# Altium PCB WX0.011.322PCB-4.2.PcbDoc (part 2 of 2)
Units mm, origin at the board's own origin, x right, y up, seen from the top; angles counter-clockwise.
Board outline 260.36 x 86.43 mm, 2 copper layers (Top Layer, Bottom Layer); 138 components, 92 nets, 432 pads, 350 vias.
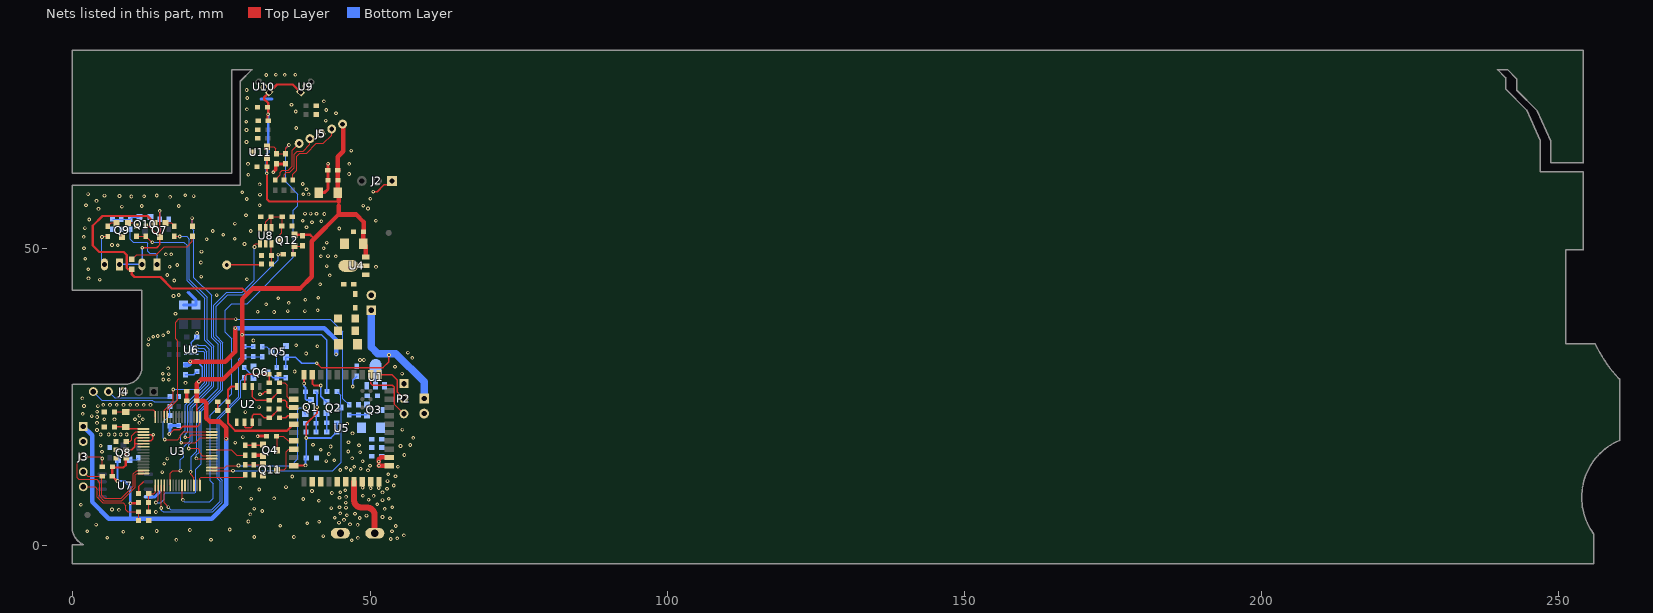
[diagram p2: the nets of this part, all layers, seen from the top]

## Via types
v1: diameter 0.61, hole 0.305, Top Layer to Bottom Layer, tented both sides, 350 vias

## Nets (pads, with @x,y where several pads share a name; then routed paths per layer and width w, separated by ;. In a path a pad name is that pad's centre, name@x,y a point inside that pad or via, vN(x,y) a via of type N, cw(c..) or ccw(c..) an arc to the next point about the centre after c; other vN are vias at no path point) (continued)
GND: C1.2 C2.2 C3.2 C4.2 C5.2 C8.2 C9.1 C10.1 C11.1 C12.1 C13.1 C14.1 C15.2 C16.1 C17.1 C18.1 C19.1 C20.1 C21.1 C22.1 C23.1 C24.1 C25.1 C26.2 C27.2 C28.1 C33.1 C34.1 C35.1 C36.2 C37.1 C38.1 C39.2 C40.1 C41.1 C42.1 C43.2 C44.2 C47.2 C48.1 C49.1 C51.1 C52.2 C53.2 C54.1 C55.2 C56.2 C57.2 C58.2 C59.2 C60.1 D3.1 J1.2 J2.1 J3.2 J4.3 J5.3 P1.2 P2.1 Q4.2 Q6.2 Q9.3 Q10.2 Q11.2 R11.1 R13.1 R24.2 R36.1 R37.1 R44.1 U1.1 U2.1 U3.33 U3.51 U3.53 U4.1 U5.22 U5.23 U5.25 U5.26 U5.28 U5.29 U5.30 U6.9 U7.4 U8.2 U8.6 U9.2 U10.2 U11.3 W1.2 | length 55.6
  Top Layer w0.254: C18.1@11.03,8.718 11.03,9.899 11.813,10.682 ; U3.53@11.854,17.593 13.136,17.593 13.387,17.844 13.387,18.352 13.147,18.593 U3.51@11.854,18.593 ; v1(16.181,18.745) 16.244,18.745 16.918,19.419 17.879,19.419 18.459,20 20.927,20 21.354,20.426 U3.33@21.354,21.593 ; C11.1@24.373,22.682 C10.1@24.373,24.155 ; v1(31.472,25.425) 31.853,25.425 32.31,25.883 C13.1@32.971,25.883 ; v1(50.522,59.512) 51.183,59.512 52.332,60.661 J2.1@53.029,60.661
  Top Layer w0.508: C24.1@19.14,24.359 C25.1@19.14,25.908 ; R11.1@30.456,15.164 31.837,15.164 Q4.2@31.949,15.052 ; v1(31.066,18.364) C28.1@32.539,18.364 ; v1(33.707,62.777) 34.114,63.183 34.114,64.199 C57.2@35.638,64.199 ; C49.1@41.36,59.334 42.291,59.334 42.89,59.933 C41.1@42.89,61.443 ; C42.1@42.864,63.094 42.864,61.468 42.928,61.531 v1(42.928,64.211)
  Bottom Layer w0.254: C36.2@18.925,28.689 20.308,28.689 C35.1@20.855,29.237 C35.1@20.982,29.11 ; U6.9@19.875,32.894 19.875,34.098 C37.1@20.842,35.066 20.842,35.688 v1(20.88,35.726) ; C22.1@28.805,33.446 30.323,33.446 R24.2@30.342,33.465 ; v1(47.068,26.721) 47.068,27.775 C3.2@47.728,28.435
  Bottom Layer w0.508: U7.4@12.702,8.165 13.78,8.165 14.581,8.966 ; v1(16.181,18.745) 16.308,18.872 C47.2@16.308,20.143 16.321,20.156 C48.1@17.807,20.156 ; R36.1@18.569,40.476 R37.1@20.728,40.476 20.728,41.238 19.382,42.584 ; 31.623,75.133 31.693,75.063 33.073,75.063 33.092,75.082 33.441,75.082
  other v1: 46.89,0.864 17.401,0.928 23.217,0.953 53.469,1.067 54.561,1.168 47.931,1.258 5.767,1.284 11.66,1.284 30.482,1.411 37.162,1.411 42.115,1.563 55.678,1.676 8.485,2.3 53.672,2.362 2.389,2.376 14.073,2.427 19.661,2.579 26.367,2.681 54.307,3.251 34.876,3.316 47.881,3.454 3.888,3.493 46.611,3.531 39.397,3.722 44.756,3.835 41.404,3.988 29.516,4.027 45.595,4.293 53.342,4.572 48.236,4.597 44.045,4.648 52.072,4.775 49.379,5.004 46.077,5.08 29.847,5.221 47.449,5.334 44.96,5.385 13.946,5.613 31.828,5.779 7.723,5.969 6.555,6.045 52.453,6.147 30.482,6.186 43.461,6.274 45.925,6.35 53.723,6.401 44.833,6.426 1.322,6.846 51.183,6.934 45.874,7.188 41.378,7.518 52.072,7.62 49.735,7.671 38.737,7.798 53.113,7.849 29.999,7.874 33.834,7.899 44.833,8.001 45.95,8.153 50.573,8.331 48.77,8.357 43.563,8.814 52.072,8.915 44.96,8.941 40.21,9.144 45.798,9.271 31.345,9.398 52.834,9.525 50.065,9.627 51.437,9.652 28.119,9.677 48.719,9.703 35.841,9.804 53.951,10.084 52.91,10.82 36.882,11.582 54.256,11.633 53.037,11.963 15.013,12.333 49.633,12.624 44.96,12.675 46.738,12.675 48.389,12.878 45.976,13.056 47.322,13.233 54.662,13.233 49.963,13.411 15.343,13.755 48.719,14.148 42.623,14.173 43.969,14.326 15.877,14.593 46.966,14.63 55.755,15.215 43.055,15.367 48.312,15.672 4.878,15.762 46.306,15.799 41.683,16.078 43.334,16.637 55.094,16.713 4.65,16.752 48.109,16.84 56.745,16.891 40.388,16.916 27.307,17.297 46.357,17.348 57.253,18.085 28.577,18.212 13.489,18.618 4.65,18.657 5.996,18.657 7.004,18.657 8.011,18.657 9.019,18.657 47.017,18.847 4.04,19.419 55.424,19.482 46.153,20.447 4.04,20.613 11.178,20.613 6.987,21.197 5.285,21.223 10.441,21.223 11.762,21.223 4.066,21.604 3.151,21.756 11.178,21.832 1.627,22.123 29.008,22.428 4.066,22.493 31.32,23.266 4.193,23.432 1.856,23.458 5.082,23.636 6.217,23.636 7.353,23.636 8.489,23.636 9.625,23.636 10.76,23.636 11.896,23.636 13.032,23.636 1.576,24.728 18.925,27.33 16.131,27.852 15.191,27.903 16.105,28.817 15.115,28.868 55.374,28.905 37.289,29.261 16.004,29.782 54.18,30.048 57.075,31.547 39.219,32.283 56.339,32.436 41.124,33.503 37.543,33.68 12.676,33.782 30.355,34.468 12.727,34.696 13.489,35.091 14.251,35.23 15.165,35.357 16.029,35.853 17.248,38.977 33.834,39.268 31.066,39.319 36.146,39.421 39.016,39.421 41.15,39.548 32.488,40.564 36.298,40.792 39.092,41.326 34.52,41.58 41.251,41.656 16.918,41.949 24.182,42.101 17.807,42.127 41.581,43.917 17.045,44.565 4.497,44.718 29.262,44.768 2.618,44.921 21.592,45.226 43.207,45.415 15.851,45.48 2.567,46.445 16.258,46.863 50.979,46.851 42.699,46.99 17.553,47.168 21.515,47.588 2.059,48.223 44.198,48.616 41.708,48.641 42.902,48.666 15.623,48.959 16.537,48.959 21.617,49.417 42.166,49.987 1.856,50.001 7.52,50.483 6.555,50.534 28.856,50.712 42.699,50.941 22.481,51.499 27.205,51.601 1.805,51.906 25.275,52.261 23.522,52.896 29.897,52.896 44.782,53.303 2.008,53.379 39.295,53.531 27.23,54.141 40.21,54.356 41.785,54.534 38.66,54.61 50.954,54.624 2.745,54.827 29.11,55.538 42.293,55.741 40.972,55.792 39.041,55.817 39.981,55.817 4.294,56.605 49.633,56.681 8.231,56.998 11.559,57.099 17.807,57.099 48.846,57.164 2.186,57.214 31.396,57.214 3.964,57.951 29.237,58.281 50.04,58.307 16.334,58.637 9.831,58.688 11.965,58.738 20.296,58.764 7.825,58.789 5.31,58.84 14.099,58.865 18.899,58.891 31.472,59.018 39.646,59.055 38.737,59.08 2.542,59.094 28.475,59.424 39.288,59.931 31.396,60.731 38.66,60.808 29.516,62.345 46.458,62.484 29.44,64.174 46.484,64.174 46.814,66.409 29.186,67.857 29.186,69.889 37.568,70.219 29.161,71.286 42.521,71.464 44.248,72.708 37.492,72.988 42.597,73.242 29.262,73.343 36.755,74.131 42.216,74.69 29.313,75.274 29.212,76.62 32.514,79.135 35.612,79.16 34.139,79.185 37.416,79.185
GPRS_3.6V: C1.1 C2.1 C5.1 C8.1 Q3.3 U5.31 U5.32 | length 4.1
  Top Layer w0.762: v1(51.437,14.097) 51.437,14.478 51.752,14.793 U5.32@53.177,14.793 ; v1(51.462,13.411) U5.31@53.316,13.411
GPRS_RST: R10.1 U3.25 | length 6
  Top Layer w0.203: U3.25@23.354,16.093 26.657,16.093 27.586,15.164 R10.1@28.958,15.164
GPRS_WAKEUP: R12.1 U3.16 | length 9.2
  Top Layer w0.203: U3.16@21.354,10.093 21.354,11.257 21.592,11.494 28.666,11.494 R12.1@28.958,11.786 ; R12.1@28.831,11.913 R12.1@28.958,12.04
IR_EN: R33.1 U3.23 | length 46
  Top Layer w0.203: R33.1@17.045,52.001 17.927,52.001 v1(17.959,51.968) ; v1(19.483,16.307) 20.982,16.307 21.287,16.002 21.287,15.55 21.744,15.093 U3.23@23.354,15.093
  Bottom Layer w0.203: v1(17.959,51.968) 19.153,51.968 19.585,51.537 19.585,44.703 22.557,41.731 22.557,34.63 23.687,33.5 23.687,26.782 20.068,23.163 20.068,17.474 19.483,16.89 v1(19.483,16.307)
IR_TX: R35.1 R40.1 U3.6 | length 54.9
  Top Layer w0.203: R40.1@10.695,52.001 R35.1@12.219,52.001 13.217,51.003 v1(13.362,51.003) ; U3.6@16.354,10.093 16.354,12.167 16.76,12.573 v1(18.086,12.573)
  Bottom Layer w0.203: v1(13.362,51.003) 18.671,51.003 19.204,50.47 19.204,44.545 22.176,41.573 22.176,34.472 23.306,33.342 23.306,26.94 19.687,23.32 19.687,17.632 18.671,16.616 18.671,14.949 18.086,14.365 v1(18.086,12.573)
KEY: U3.22 U8.1 | length 46.2
  Top Layer w0.203: v1@20.626,14.593 U3.22@23.354,14.593 ; v1(30.532,50.19) 30.532,50.571 30.724,50.763 U8.1@31.485,50.763
  Bottom Layer w0.203: v1(20.753,14.63) 20.753,15.247 21.211,15.704 21.211,22.689 24.83,26.309 24.83,33.973 23.7,35.104 23.7,40.387 25.897,42.584 28.509,42.584 30.532,44.608 v1(30.532,50.19)
KEY_VCC: R14.2 U3.2 | length 60
  Top Layer w0.203: v1(13.946,7.214) 14.354,7.621 U3.2@14.354,10.093 ; v1(34.546,48.92) 34.596,48.971 R14.2@35.384,48.971
  Bottom Layer w0.203: v1(13.946,7.214) 14.759,7.214 15.318,7.772 15.318,8.585 15.56,8.827 20.474,8.827 20.626,8.98 20.626,12.776 21.592,13.741 21.592,22.531 25.211,26.151 25.211,34.131 24.081,35.261 24.081,40.229 26.055,42.203 28.666,42.203 34.546,48.082 v1(34.546,48.92)
LED0: R29.2 U3.14 | length 50.3
  Top Layer w0.203: v1(19.788,12.37) 19.788,11.977 20.354,11.411 U3.14@20.354,10.093 ; v1(20.042,55.055) 20.042,53.754 R29.2@20.093,53.703
  Bottom Layer w0.203: v1(19.788,12.37) 19.89,12.471 19.89,14.922 20.83,15.862 20.83,22.847 24.449,26.466 24.449,33.815 23.319,34.946 23.319,42.047 20.347,45.019 20.347,52.953 20.042,53.257 v1(20.042,55.055)
MI_CTL: C57.1 C58.1 U3.10 U11.2 | length 83
  Top Layer w0.203: U3.10@18.354,10.093 18.354,7.784 v1(18.493,7.645) ; U11.2@32.672,67.066 33.786,67.066 34.152,66.7 C58.1@34.152,65.812 ; C58.1@34.241,65.901 C57.1@35.765,65.901 35.765,66.802 v1(36.324,67.361)
  Bottom Layer w0.203: v1(18.493,7.645) 18.759,7.38 23.05,7.38 23.624,7.953 23.624,10.346 23.116,10.854 23.116,21.9 26.735,25.52 26.735,34.762 25.605,35.893 25.605,39.598 26.686,40.679 29.298,40.679 37.086,48.467 37.086,56.393 37.797,57.105 37.797,59.106 35.765,61.138 35.765,66.802 v1(36.324,67.361)
NB_RESET: C28.2 Q4.3 U5.17 | length 5.6
  Top Layer w0.203: C28.2@34.241,18.364 C28.2@34.349,18.364 ; Q4.3@34.349,16.002 C28.2@34.349,18.364 ; U5.17@37.177,17.593 36.18,17.593 35.409,18.364 C28.2@34.349,18.364
NB_RX: Q1.3 R5.1 U5.10 | length 5.2
  Top Layer w0.305: U5.10@38.877,28.693 38.838,28.655 38.889,28.604 v1(38.889,27.229)
  Bottom Layer w0.305: v1(38.889,27.229) 38.889,26.772 39.118,26.543 R5.1@39.118,25.857 39.118,24.638 39.289,24.466 Q1.3@40.027,24.466
NB_RX_MCU: Q2.3 R6.2 U3.18 | length 34.5
  Top Layer w0.203: U3.18@23.354,12.593 23.374,12.573 v1(26.926,12.573)
  Bottom Layer w0.203: v1(26.926,12.573) 43.664,12.573 45.115,14.023 45.115,20.083 45.095,20.102 Q2.3@45.095,23.19 ; R6.2@44.426,25.883 45.042,25.267 Q2.3@45.042,23.19
NB_TX: Q2.2 U5.9 | length 6.2
  Top Layer w0.305: U5.9@40.277,28.693 40.311,28.659 40.311,27.153 40.565,26.899 v1(41.683,26.899)
  Bottom Layer w0.305: v1(41.683,26.899) 41.683,25.099 Q2.2@42.642,24.14
NB_TX_MCU: Q1.2 U3.19 | length 26
  Top Layer w0.203: U3.19@23.354,13.093 25.541,13.093 25.884,13.437 v1(27.84,13.437)
  Bottom Layer w0.203: v1(27.84,13.437) 36.705,13.437 37.822,14.554 37.822,22.885 38.102,23.165 v1(39.041,23.165) 39.041,22.102 Q1.2@39.077,22.066 Q1.2@38.94,22.203
NetC4_1: C4.1 Q3.2 R7.2 U1.3
NetC6_1: C6.1 Q1.1 R3.2 | length 3
  Bottom Layer w0.203: Q1.1@40.89,21.98 Q1.1@40.977,22.066
  Bottom Layer w0.254: R3.2@40.89,19.075 Q1.1@40.89,21.98
NetC7_2: C7.2 Q2.1 R4.1 | length 3.2
  Bottom Layer w0.254: Q2.1@42.642,22.24 42.689,22.193 R4.1@42.689,19.069
NetC9_2: C9.2 C26.1 C39.1 Q12.3 U8.4 U8.5 | length 10.3
  Top Layer w0.203: U8.5@32.437,53.43 32.437,54.433 33.339,55.335 33.364,55.309 C26.1@33.364,55.27 ; C26.1@33.301,55.27 C26.1@33.364,55.27 ; U8.4@33.39,53.43 33.364,53.455 C26.1@33.364,55.27 ; Q12.3@34.85,51.308 34.85,52.324 35.142,52.616 C9.2@35.142,53.721 35.194,53.772 35.194,55.321 35.143,55.27 C26.1@33.364,55.27
NetC12_2: C12.2 R15.1 U2.7 | length 7.4
  Top Layer w0.254: U2.7@28.856,26.726 28.856,28.397 29.262,28.804 C12.2@32.958,28.804 33.038,28.724 R15.1@33.038,27.356
NetC13_2: C13.2 R16.1 U2.6 | length 7.1
  Top Layer w0.254: U2.6@30.126,26.726 30.126,25.07 30.786,24.409 R16.1@33.038,24.409 33.199,24.409 C13.2@34.673,25.883
NetC14_2: C14.2 R17.1 U2.2 U2.3 | length 9.5
  Top Layer w0.254: U2.2@28.856,20.726 28.856,19.964 29.021,19.799 29.961,19.799 30.126,19.964 U2.3@30.126,20.726 30.126,21.768 30.405,22.047 31.548,22.047 32.133,21.463 R17.1@33.038,21.463 33.199,21.463 C14.2@34.673,22.936
NetC15_1: C15.1 D1.2 U4.2
NetC23_2: C23.2 U3.50 | length 4
  Top Layer w0.203: C23.2@8.955,17.489 9.654,17.489 9.908,17.743 9.908,18.403 10.597,19.093 U3.50@11.854,19.093
NetC40_2: C40.2 R50.2 U8.3 | length 3.4
  Top Layer w0.203: U8.3@33.39,50.763 33.39,48.794 C40.2@33.403,48.782 33.403,47.34 R50.2@33.409,47.334
NetC44_1: C44.1 Q10.1 R42.1 R44.2 | length 4.7
  Bottom Layer w0.203: R44.2@6.656,54.896 8.085,54.896 C44.1@8.104,54.877 9.616,54.877 R42.1@9.628,54.865 9.99,55.226 Q10.1@11.167,55.226
NetC60_2: C60.2 J3.5 R30.2 | length 13.7
  Top Layer w0.203: J3.5@1.729,9.851 3.727,9.851 4.116,9.462 4.116,8.08 5.045,7.151 8.434,7.151 8.917,6.668 8.917,6.009 9.247,5.679 R30.2@11.011,5.679 11.025,5.665 C60.2@11.025,4.179
NetD4_2: D4.2 R29.1 | length 12.3
  Top Layer w0.203: D4.2@9.908,48.121 10.695,48.909 13.977,48.909 15.349,50.28 19.204,50.28 20.093,51.169 R29.1@20.093,52.001
NetD6_1: D6.1 R42.2 | length 9.5
  Bottom Layer w0.203: R42.2@9.628,53.163 9.628,51.474 10.111,50.991 12.422,50.991 12.575,50.839 12.575,49.479 12.905,49.149 13.845,49.149 14.149,48.844 D6.1@14.149,47.461
NetD6_2: D6.2 D7.1 Q7.3 R35.2 R39.2 | length 20.8
  Top Layer w0.254: D6.2@11.609,47.461 D6.2@11.609,47.791 ; v1(11.66,50.077) 14.087,50.077 14.632,50.622 Q7.3@14.632,51.849 ; R35.2@12.219,53.703 12.778,53.703 Q7.3@14.632,51.849 ; v1@14.581,56.3 v1(14.607,56.275) 14.632,56.249 Q7.3@14.632,51.849
  Bottom Layer w0.254: D7.1@7.418,47.461 D7.1@7.622,47.461 ; D7.1@7.622,47.283 D7.1@7.822,47.283 D6.2@11.613,47.283 11.613,50.03 v1(11.66,50.077) ; R39.2@14.607,54.89 v1(14.607,56.275)
NetD7_2: D7.2 R43.2 | length 5.4
  Top Layer w0.203: v1(4.878,51.88) 4.974,51.976 R43.2@5.869,51.976
  Bottom Layer w0.203: D7.2@4.878,47.461 v1(4.878,51.88)
NetJ4_4: J4.4 R48.2 | length 11
  Bottom Layer w0.203: J4.4@5.971,25.871 7,24.841 16.334,24.841 R48.2@16.334,25.058
NetJ4_5: J4.5 R49.2 | length 15.6
  Bottom Layer w0.203: J4.5@3.431,25.871 4.853,24.448 13.362,24.448 13.642,24.169 17.172,24.169 17.807,24.804 R49.2@17.807,25.058
NetJ5_2: J5.2 R45.2 | length 12.7
  Top Layer w0.203: R45.2@36.959,61.468 36.959,62.433 37.67,63.144 37.67,65.481 38.152,65.964 39.301,65.964 40.957,67.62 42.136,67.62 43.527,69.011 J5.2@43.527,70.056
NetJ5_4: J5.4 R46.2 | length 9.7
  Top Layer w0.203: R46.2@35.511,61.468 35.511,62.357 35.892,62.738 36.501,62.738 37.263,63.5 37.263,65.837 37.771,66.345 38.737,66.345 39.873,67.481 J5.4@39.873,68.429
NetJ5_5: J5.5 R47.2 | length 8.4
  Top Layer w0.203: R47.2@34.038,61.468 34.901,62.332 34.901,62.814 35.22,63.133 36.236,63.133 36.882,63.779 36.882,66.452 J5.5@38.046,67.616
NetKT1_1: KT1.1 R50.1 | length 5.9
  Top Layer w0.254: KT1.1@25.863,47.183 31.556,47.183 R50.1@31.707,47.334
NetP2_2: P2.2 U5.1 | length 7
  Top Layer w0.254: U5.1@51.477,28.693 53.655,28.693 54.535,27.813 54.535,25.806 P2.2@55.678,24.663
NetP2_3: P2.3 U5.2 | length 10.8
  Top Layer w0.254: U5.2@50.077,28.693 50.077,27.268 50.395,26.949 53.723,26.949 54.078,26.594 54.078,23.724 P2.3@55.678,22.123
NetQ3_1: Q3.1 R7.1 R8.2 | length 2.9
  Bottom Layer w0.254: R8.2@46.484,21.946 R7.1@48.033,21.946 Q3.1@49.388,21.946
NetQ4_1: Q4.1 R10.2 R11.2 | length 3.1
  Top Layer w0.254: R10.2@28.958,16.866 R11.2@30.456,16.866 31.862,16.866 Q4.1@31.949,16.952 ; Q4.1@31.837,17.12 Q4.1@31.923,17.206
NetQ5_1: Q5.1 R20.2 | length 4.3
  Bottom Layer w0.203: R20.2@34.292,29.909 34.292,32.022 Q5.1@35.822,33.552
NetQ5_3: Q5.3 R22.1 | length 1.9
  Bottom Layer w0.203: R22.1@31.828,33.44 32.584,33.44 Q5.3@33.422,32.602
NetQ6_1: Q6.1 R21.2 | length 2.4
  Bottom Layer w0.254: R21.2@28.805,29.909 30.348,28.366 Q6.1@30.348,28.172
NetQ6_3: Q6.3 R19.1 R20.1 | length 3.4
  Bottom Layer w0.254: Q6.3@32.748,29.122 33.663,28.208 R20.1@34.292,28.208 R19.1@35.816,28.208
NetQ7_1: Q7.1 R33.2 | length 1.7
  Top Layer w0.203: Q7.1@15.582,54.249 16.499,54.249 R33.2@17.045,53.703
NetQ8_1: Q8.1 R38.2 | length 1.6
  Bottom Layer w0.203: Q8.1@9.486,14.409 10.638,14.409 R38.2@10.974,14.746
NetQ9_1: Q9.1 R40.2 | length 1.7
  Top Layer w0.203: Q9.1@9.232,54.249 10.149,54.249 R40.2@10.695,53.703
NetQ9_2: Q9.2 R43.1 | length 1.7
  Top Layer w0.203: R43.1@5.869,53.678 6.44,54.249 Q9.2@7.332,54.249
NetQ11_1: Q11.1 R12.2 R13.2 | length 3
  Top Layer w0.203: R12.2@28.958,13.564 R13.2@30.431,13.564 31.862,13.564 Q11.1@31.949,13.65
NetQ12_1: Q12.1 R9.1 R14.1 | length 2.8
  Top Layer w0.203: R14.1@37.086,48.971 37.086,50.193 Q12.1@37.25,50.358 38.574,50.358 R9.1@38.61,50.394
NetU5_27: U5.27 W1.1 | length 11.2
  Top Layer w1.016: U5.27@47.277,10.693 47.277,7.614 ccw(c48.516,7.614) 48.516,6.375 49.43,6.375 cw(c49.43,5.055) 50.751,5.055 50.751,2.376 cw(c50.598,2.376) 50.598,2.223 ccw(c50.776,2.223) W1.1@50.776,2.046
OPEN: C47.1 R48.1 U3.31 | length 14.8
  Top Layer w0.203: v1(15.445,17.805) 17.625,17.805 18.086,18.267 18.086,18.513 18.666,19.093 U3.31@23.354,19.093
  Bottom Layer w0.203: v1(15.445,17.805) 15.191,18.059 15.191,20.797 16.238,21.845 C47.1@16.308,21.845 16.308,23.331 R48.1@16.334,23.356
OUT_A: U3.29 U6.6 | length 24.6
  Top Layer w0.203: v1(18.213,17.272) 20.55,17.272 21.371,18.093 U3.29@23.354,18.093
  Bottom Layer w0.203: v1(18.213,17.272) 18.099,17.386 18.099,18.526 18.925,19.352 18.925,23.636 22.544,27.256 22.544,32.589 21.989,33.144 U6.6@20.825,33.144
OUT_B: U3.30 U6.5 | length 23.5
  Top Layer w0.203: v1(18.887,18.2) 19.534,18.2 19.927,18.593 U3.30@23.354,18.593
  Bottom Layer w0.203: v1(18.887,18.2) 18.887,18.67 19.306,19.089 19.306,23.478 22.925,27.098 22.925,32.995 22.276,33.644 U6.5@20.825,33.644
OUT_EN: U3.45 U6.7 | length 17.5
  Top Layer w0.203: U3.45@15.354,21.593 15.354,22.774 16.866,24.285 v1(16.866,26.233)
  Bottom Layer w0.203: v1(16.866,26.233) 16.922,26.289 21.039,26.289 22.163,27.413 22.163,32.431 21.95,32.645 U6.7@20.825,32.645
PWR_EN: R8.1 U3.44 | length 58.9
  Top Layer w0.203: U3.44@15.854,21.593 15.854,22.735 17.653,24.534 17.653,34.36 17.248,34.765 17.248,37.555 17.832,38.139 27.293,38.139 v1(27.357,38.075)
  Bottom Layer w0.203: v1(27.357,38.075) 43.283,38.075 45.423,35.935 45.423,24.708 R8.1@46.484,23.647
RESET: C18.2 R18.1 R30.1 U3.1 | length 5.5
  Top Layer w0.203: R30.1@12.713,5.679 R18.1@12.713,7.224 12.732,7.243 C18.2@12.732,8.718 12.801,8.65 13.591,8.65 13.854,8.913 U3.1@13.854,10.093
SIM_CLK: R16.2 U5.13 | length 3.4
  Top Layer w0.254: R16.2@34.74,24.409 35.663,24.409 35.943,24.13 35.943,23.393 36.143,23.193 U5.13@37.177,23.193
SIM_DATA: R17.2 U5.14 | length 2.6
  Top Layer w0.254: R17.2@34.74,21.463 35.79,21.463 36.121,21.793 U5.14@37.177,21.793
SIM_RST: R15.2 U5.12 | length 4.7
  Top Layer w0.203: R15.2@34.74,27.356 35.587,27.356 36.019,26.924 36.019,24.968 36.394,24.593 U5.12@37.177,24.593
SIM_VDD: C10.2 C11.2 U2.8 U5.15 | length 19.4
  Top Layer w0.381: U2.8@27.586,26.726 26.677,26.726 26.075,26.124 C10.2@26.075,24.155 C11.2@26.075,22.682 26.075,20.536 27.307,19.304 36.017,19.304 37.106,20.393 U5.15@37.177,20.393
STATE_MCU: U3.11
STATUS: U3.55
SVS: C22.2 R22.2 R24.1 U3.4 | length 43.2
  Top Layer w0.203: U3.4@15.354,10.093 15.354,7.14 v1(16.054,6.44)
  Bottom Layer w0.203: v1(16.054,6.44) 16.486,6.008 23.386,6.008 24.767,7.389 24.767,10.819 24.259,11.327 24.259,21.427 27.878,25.046 27.878,31.325 28.316,31.764 C22.2@28.824,31.764 ; C22.2@28.805,31.744 C22.2@28.824,31.764 ; R22.2@31.828,31.738 30.367,31.738 R24.1@30.342,31.764 C22.2@28.824,31.764
SVS_EN: R21.1 U3.3 | length 38.2
  Top Layer w0.203: v1(14.854,6.299) U3.3@14.854,10.093
  Bottom Layer w0.203: v1(14.854,6.299) 14.854,5.925 15.152,5.627 23.544,5.627 25.148,7.231 25.148,10.977 24.64,11.485 24.64,21.269 28.259,24.888 28.259,27.661 R21.1@28.805,28.208
SWCLK: J3.4 R2.1 U3.63 | length 17.1
  Top Layer w0.203: J3.4@1.729,12.391 2.473,11.647 R2.1@4.904,11.647 4.878,11.621 4.878,8.396 5.361,7.913 8.079,7.913 10.111,9.945 10.111,12.009 10.695,12.593 U3.63@11.854,12.593
SWDIO: J3.3 R1.1 U3.64 | length 26
  Top Layer w0.203: R1.1@4.929,13.095 v1(4.929,14.619) 4.616,14.931 J3.3@1.729,14.931 0.699,13.902 0.699,11.381 0.992,11.088 3.964,11.088 4.497,10.555 4.497,8.238 5.203,7.532 8.237,7.532 10.492,9.787 10.492,11.85 10.735,12.093 U3.64@11.854,12.093
VBAT: D1.1 D2.1 D3.2 J1.1 P1.1 Q5.2 R19.2 | length 41.6
  Top Layer w0.254: v1(41.023,30.632) 41.746,29.909 52.173,29.909 53.164,30.9 v1(53.164,32.029)
  Bottom Layer w0.254: R19.2@35.816,29.909 35.822,29.916 Q5.2@35.822,31.652 37.451,31.652 38.471,30.632 v1(41.023,30.632)
  Bottom Layer w1.27: J1.1@50.192,39.548 50.192,33.376 51.31,32.258 54.332,32.258 59.082,27.508 P1.1@59.082,24.714
VCC: C16.2 C17.2 C20.2 C21.2 C24.2 C25.2 C35.2 C41.2 C42.2 C49.2 C51.2 C54.2 C59.1 D4.1 J3.1 J5.1 Q7.2 Q8.2 Q12.2 R1.2 R2.2 R6.1 R9.2 R18.2 U3.34 U3.52 U3.54 U4.3 U6.8 U9.1 U10.1 U11.1 | length 280.4
  Top Layer w0.254: C20.2@8.955,16.079 9.87,16.079 10.401,16.61 10.401,17.093 ; U3.54@11.854,17.093 10.401,17.093 ; U3.52@11.854,18.093 10.664,18.093 10.401,17.83 10.401,17.093 ; C24.2@20.841,24.359 20.854,24.346 U3.34@20.854,21.593
  Top Layer w0.381: v1(7.495,10.834) 7.418,10.834 R2.2@6.606,11.647 6.606,13.069 6.631,13.095 8.473,13.095 8.879,13.501 8.879,14.593 C21.2@8.955,14.669 C20.2@8.955,16.079 ; v1(9.654,7.075) 10.862,7.075 R18.2@11.011,7.224 ; Q7.2@13.682,54.249 12.52,55.411 4.955,55.411 3.304,53.76 3.304,50.458 4.421,49.34 8.548,49.34 9.044,48.844 9.044,46.699 9.273,46.47 D4.1@9.908,46.47 9.908,45.568 10.339,45.136 14.708,45.136 16.625,43.219 28.475,43.219 29.351,42.343 ; C59.1@32.621,63.703 32.621,58.224 33.01,57.836 44.68,57.836 ; C59.1@32.653,63.703 U11.1@32.653,65.147 ; C54.2@32.857,71.425 32.742,71.539 32.742,72.441 v1(32.831,72.53) 32.831,74.409 32.133,75.108 32.133,75.37 U10.1@33,76.237 34.31,77.547 36.965,77.547 U9.1@38.275,76.237 ; Q12.2@37.25,52.258 39.895,52.258 40.584,51.569
  Top Layer w0.762: v1(25.757,17.958) 25.757,19.787 24.703,20.841 23.001,20.841 22.43,21.412 22.43,23.952 22.023,24.359 C24.2@20.841,24.359 C25.2@20.841,25.908 20.841,27.164 21.592,27.915 25.224,27.915 28.45,31.14 v1(28.45,35.433) 28.45,41.441 29.351,42.343 30.228,43.219 38.191,43.219 40.184,45.212 40.184,51.169 40.584,51.569 44.68,55.665 ; C49.2@44.546,59.334 44.546,63.162 C42.2@44.566,63.141 ; C42.2@44.566,63.094 C42.2@44.566,63.141 ; C42.2@44.614,63.094 C42.2@44.566,63.141 ; 44.68,57.138 44.68,55.665 ; 44.68,57.836 C49.2@44.68,59.334 ; J5.1@45.354,70.87 45.493,70.731 45.493,66.282 44.566,65.355 C42.2@44.566,63.141 ; U4.3@49.227,48.53 49.227,50.428 48.841,50.814 48.841,52.726 C17.2@48.884,52.769 48.884,54.407 47.627,55.665 44.68,55.665
  Bottom Layer w0.254: C35.2@20.855,30.938 21.757,30.037 21.757,28.13 v1(21.185,27.559) ; v1(28.45,35.433) 41.81,35.433 42.724,34.519 R6.1@42.724,25.883
  Bottom Layer w0.381: Q8.2@7.586,14.409 7.495,14.318 v1(7.495,10.834) 8.647,10.834 9.628,9.852 9.628,4.535 ; v1(32.59,62.586) 32.59,65.837 32.831,66.078 v1(32.831,72.53)
  Bottom Layer w0.762: J3.1@1.729,20.011 3.227,18.512 3.227,7.303 6.026,4.505 23.356,4.505 25.808,6.957 25.808,17.907 v1(25.757,17.958)
VCC_M: C3.1 C19.2 C36.1 D2.2 U1.2 U6.1 | length 33.6
  Top Layer w0.762: v1(19.738,30.912) 25.605,30.912 27.307,32.614 v1(27.307,36.551)
  Bottom Layer w0.762: C36.1@18.925,30.391 19.496,30.391 19.738,30.633 v1(19.738,30.912) ; v1(27.307,36.551) 42.267,36.551 44.274,34.544 v1(44.274,32.156)
  other v1: 48.287,31.191 48.947,31.191
VDD_EXT: C6.2 C7.1 C27.1 R3.1 R4.2 R5.2 U5.20 | length 25
  Top Layer w0.305: U5.20@37.177,13.393 37.246,13.462 v1(39.11,13.462) ; v1(39.258,18.059) 39.258,20.435 41.048,22.225 v1(41.048,23.266)
  Bottom Layer w0.305: v1(39.11,13.462) 39.11,14.559 C27.1@39.258,14.707 v1(39.258,18.059) ; C6.2@39.17,20.549 39.258,20.461 R3.1@39.258,19.007 ; R3.1@39.189,19.075 R3.1@39.258,19.007 ; R5.2@40.819,25.857 41.048,25.629 v1(41.048,23.266) ; C7.1@44.371,20.619 44.391,20.599 R4.2@44.391,19.069 43.406,18.085 39.283,18.085 v1(39.258,18.059) ; v1(39.258,18.059) R3.1@39.258,19.007
WAKEUP: Q11.3 U5.18 | length 5.9
  Top Layer w0.203: Q11.3@34.349,12.7 35.511,12.7 35.841,13.03 35.841,15.748 36.286,16.193 U5.18@37.177,16.193
XT1: C33.2 U3.48 Y1.2 | length 8.1
  Top Layer w0.203: C33.2@6.971,22.442 Y1.2@8.876,22.442 9.231,22.797 13.54,22.797 13.854,22.483 U3.48@13.854,21.593
XT2: C34.2 U3.49 Y1.1 | length 5
  Top Layer w0.254: C34.2@6.971,19.902 7.011,19.942 Y1.1@8.876,19.942 9.224,19.593 U3.49@11.854,19.593
pads on no net: LABEL1.0 LABEL1.1 LABEL2.0 LABEL2.1 U2.4 U2.5 U3.9 U3.15 U3.21 U3.24 U3.26 U3.27 U3.28 U3.35 U3.36 U3.37 U3.38 U3.40 U3.41 U3.43 U3.47 U3.57 U3.62 U5.3 U5.4 U5.5 U5.6 U5.7 U5.8 U5.11 U5.16 U5.19 U5.21 U5.24 U5.33 U5.34 U5.35 U5.36 U5.37 U5.38 U5.39 U5.40 U5.41 U5.42 U5.43 U5.44 U5.45 U5.46

## Polygon pours and split planes (outlines as drawn)
GND on Bottom Layer "GND_L02_P010" (solid, remove dead copper, pour order 10): 30.431,80.176 28.241,77.987 28.241,60.443 -0.1,60.443 -0.1,43.043 11.7,43.043 11.7,29.957 8.699,26.956 -0.1,26.956 -0.1,1.855 1.754,0 56.792,0 56.792,13.349 61.202,17.759 61.202,29.71 57.028,33.884 52.1,33.884 52.1,49.835 55.1,49.835 55.1,62.716 47.804,62.716 47.804,72.81 40.477,80.137
GND on Top Layer "GND_L01_P012" (solid, remove dead copper, pour order 12): 30.431,80.176 28.241,77.987 28.241,60.443 -0.1,60.443 -0.1,43.043 11.7,43.043 11.7,29.957 8.699,26.956 -0.1,26.956 -0.1,1.855 1.754,0 56.792,0 56.792,13.349 61.202,17.759 61.202,29.71 57.028,33.884 52.1,33.884 52.1,49.835 55.1,49.835 55.1,62.716 47.804,62.716 47.804,72.81 40.477,80.137

## Keep-outs
Keep-Out Layer:
  circle w0.254: c35.79,71.667 r1.1
  circle w0.254: c24.6,57.442 r1.3
  circle w0.254: c119.4,57.442 r1.2
  circle w0.254: c90.9,57.442 r1.3
  circle w0.254: c102.09,71.667 r1.1
  circle w0.254: c185.7,57.442 r1.2
  circle w0.254: c157.2,57.442 r1.3
  circle w0.254: c168.39,71.667 r1.1
  circle w0.254: c252,57.442 r1.2
  circle w0.254: c223.5,57.442 r1.3
  circle w0.254: c234.69,71.667 r1.1
  circle w0.254: c53.1,57.442 r1.2
  lines w0.254: 0,5.008 0,26.957 8.7,26.957 ccw(c8.7,29.957) 11.7,29.957 11.7,43.043 0,43.043 0,60.443 28.241,60.443 28.241,68.873 28.241,77.987 30.431,80.176 ; 0,5.817 0,2.997 ccw(c3,2.997) 3,-0.003 ; 0,80.167 0,62.738 26.621,62.738 26.621,80.176 ; 42.489,80.176 44.089,78.576 44.089,76.671 47.586,73.174 49.855,68.078 49.855,64.491 57.7,64.491 57.7,62.687 92.921,62.687 92.921,80.176 ; 58.792,0 58.792,14.239 60.073,15.519 64.2,15.519 64.2,0 ; 61.19,27.89 cw(c76.6,42.883) 57.114,33.797 52.1,33.797 52.1,49.835 55.1,49.835 55.1,62.716 47.804,62.716 47.804,68.078 45.535,73.174 42.039,76.671 42.039,78.576 40.438,80.176 ; 61.2,17.763 61.2,27.89 ; 61.202,17.759 ccw(c65.3,8.092) 54.8,8.092 ccw(c65.299,8.092) 56.792,1.938 56.792,0 ; 62.8,80.176 93.331,80.176 ; 66.2,80.176 96.731,80.176 ; 66.3,5.008 66.3,26.957 75,26.957 ccw(c75,29.957) 78,29.957 78,43.043 66.3,43.043 66.3,60.443 94.541,60.443 94.541,68.873 94.541,77.987 96.731,80.176 ; 66.3,5.817 66.3,2.997 ccw(c69.3,2.997) 69.3,-0.003 ; 73.2,80.176 40.438,80.176 ; 96.603,0 103.182,0 121.099,0 123.091,0 ; 96.604,0 71.207,0 66.2,0 56.791,0 ; 105.303,61.573 105.303,64.973 107.603,64.973 107.603,61.573 105.303,61.573 ; 108.789,80.176 110.389,78.576 110.389,76.671 113.886,73.174 116.155,68.078 116.155,64.491 124,64.491 124,62.687 159.221,62.687 159.221,80.176 ; 125.092,0 125.092,14.239 126.372,15.52 130.5,15.52 130.5,0 ; 127.49,27.89 cw(c142.9,42.883) 123.414,33.797 118.4,33.797 118.4,49.835 121.4,49.835 121.4,62.716 114.104,62.716 114.104,68.078 111.835,73.174 108.339,76.671 108.339,78.576 106.738,80.176 ; 127.5,17.763 127.5,27.89 ; 127.502,17.759 ccw(c131.6,8.092) 121.1,8.092 ccw(c131.599,8.092) 123.092,1.938 123.092,0 ; 132.5,80.176 163.031,80.176 ; 132.6,5.008 132.6,26.957 141.3,26.957 ccw(c141.3,29.957) 144.3,29.957 144.3,43.043 132.6,43.043 132.6,60.443 160.841,60.443 160.841,68.873 160.841,77.987 163.031,80.176 ; 132.6,5.817 132.6,2.997 ccw(c135.6,2.997) 135.6,-0.003 ; 139.5,80.176 106.738,80.176 ; 171.603,61.573 171.603,64.973 173.903,64.973 ; 171.603,61.573 173.903,61.573 173.903,64.973 ; 175.089,80.176 176.689,78.576 176.689,76.671 180.186,73.174 182.455,68.078 182.455,64.491 190.3,64.491 190.3,62.687 225.521,62.687 225.521,80.176 ; 187.399,8.092 ccw(c197.899,8.092) 189.392,1.938 189.392,0 ; 187.4,8.092 cw(c197.9,8.092) 193.802,17.759 ; 191.392,0 191.392,14.239 192.672,15.52 196.8,15.52 196.8,0 ; 193.79,27.89 cw(c209.2,42.883) 189.714,33.797 184.7,33.797 184.7,49.835 187.7,49.835 187.7,62.716 180.404,62.716 180.404,68.078 178.135,73.174 174.639,76.671 174.639,78.576 173.038,80.176 ; 193.8,17.763 193.8,27.89 ; 198.8,80.176 229.331,80.176 ; 198.9,5.008 198.9,26.957 207.6,26.957 ; 198.9,5.817 198.9,2.997 ccw(c201.9,2.997) 201.9,-0.003 ; 205.8,80.176 173.038,80.176 ; 207.6,26.957 ccw(c207.6,29.957) 210.6,29.957 210.6,43.043 198.9,43.043 198.9,60.443 227.141,60.443 227.141,68.873 227.141,77.987 229.331,80.176 ; 241.389,80.176 242.989,78.576 242.989,76.671 246.486,73.174 248.755,68.078 248.755,64.491 254,64.491 254,80.176 239.338,80.176 ; 254,80.112 254,83.176 0,83.176 0,80.176 30.431,80.176 ; 260.09,27.89 cw(c275.5,42.883) 256.014,33.797 251,33.797 251,49.835 254,49.835 254,62.716 246.704,62.716 246.704,68.078 244.435,73.174 240.939,76.671 240.939,78.576 239.338,80.176 ; 260.1,17.763 260.1,27.89 ; 260.102,17.759 ccw(c264.2,8.092) 253.7,8.092 ccw(c264.199,8.092) 255.692,1.938 255.692,0 ; 30.431,80.176 40.438,80.176 ; 56.791,0 54.799,0 36.882,0 30.303,0 4.907,0 0,0 0,-3 255.691,-3 255.691,0 ; 96.731,80.176 106.738,80.176 ; 123.091,0 132.5,0 137.507,0 162.904,0 169.482,0 187.399,0 189.391,0 ; 163.031,80.176 173.038,80.176 ; 189.391,0 198.8,0 203.807,0 229.204,0 235.782,0 253.699,0 255.691,0 ; 229.331,80.176 239.338,80.176 ; 39.003,61.573 39.003,64.973 41.303,64.973 41.303,61.573 39.003,61.573 ; 237.903,61.573 240.203,61.573 240.203,64.973 237.903,64.973 237.903,61.573

## Other copper
Top Layer:
  region net VCC_M: 45.239,36.805 45.239,35.027 45.442,34.823 45.442,31.699 45.62,31.521 49.201,31.521 49.328,31.394 49.328,31.09 49.1,30.861 44.223,30.861 43.893,31.191 43.893,36.754 43.944,36.805
  region net NetC15_1: 45.239,37.49 45.239,42.748 46.026,43.536 46.026,46.584 45.823,46.787 44.756,46.787 43.944,45.974 43.944,37.49
  region net VBAT: 49.201,40.564 50.205,40.483 51.012,40.417 51.03,39.526 51.026,39.493 51.012,38.754 50.973,38.667 49.684,38.735 48.363,37.414 48.363,35.484 48.236,35.357 46.839,35.357 46.712,35.484 46.712,40.284 46.992,40.564
  region net GPRS_3.6V: 51.945,13.132 51.716,12.903 51.183,12.903 51.056,13.03 51.056,15.062 51.183,15.189 51.818,15.189 51.945,15.062
  region net VCC: 43.563,57.607 43.563,55.347 44.274,54.635 45.849,54.635 46.153,54.94 46.153,57.709 45.925,57.937 43.893,57.937
  pour cut-out: 24.6,54.943 cw(c24.6,57.443) 22.1,57.443 cw(c24.6,57.443) 24.6,59.943 cw(c24.6,57.443) 27.1,57.443 cw(c24.6,57.443)
Bottom Layer:
  rectangle net AIN8: 18.721,33.516 19.128,35.066
  rectangle net VCC: 20.626,30.951 21.058,32.221
  rectangle net VCC_M: 18.696,30.607 19.128,32.195
  region net GPRS_3.6V: 51.056,13.03 51.056,14.249 51.513,14.707 51.513,18.39 50.929,18.974 50.929,20.65 51.386,21.107 51.386,23.292 52.427,23.292 52.427,13.106 52.224,12.903 51.183,12.903
  region net VCC_M: 47.296,29.642 47.296,31.394 47.423,31.521 50.725,31.521 50.878,31.369 50.878,29.947 50.573,29.642
  region net NetC4_1: 50.014,27.508 50.014,23.266 49.938,23.19 47.754,23.19 47.601,23.343 47.601,27.254 47.855,27.508
  pour cut-out: 25.707,44.373 cw(c25.707,47.443) 22.637,47.443 cw(c25.707,47.443) 25.707,50.512 cw(c25.707,47.443) 28.776,47.443 cw(c25.707,47.443)
  pour cut-out: 24.6,54.943 cw(c24.6,57.443) 22.1,57.443 cw(c24.6,57.443) 24.6,59.943 cw(c24.6,57.443) 27.1,57.443 cw(c24.6,57.443)
Multi-Layer:
  pour cut-out: 48.516,0.015 48.516,3.849 53.138,3.849 53.138,-0.002
  pour cut-out: 25.863,43.625 cw(c25.863,47.183) 22.305,47.183 cw(c25.863,47.183) 25.863,50.741 cw(c25.863,47.183) 29.421,47.183 cw(c25.863,47.183)

## Silkscreen, mask and mechanical layers (free items; w line width, h text height)
Top Overlay:
  circle w0.076: c24.6,57.443 r3.75
  circle w0.076: c53.1,57.443 r2.5
  lines w0.013: 6.863,44.754 cw(c6.863,47.254) 6.863,49.754 12.863,49.754 cw(c12.863,47.254) 12.863,44.754 6.863,44.754
  text "V" at 46.28,67.984 h1.27 r24
  text "T" at 44.655,67.171 h1.27 r24
  text "G" at 42.648,66.384 h1.27 r24
  text "P" at 41.124,65.634 h1.27 r24
  text "D" at 40.388,65.329 h1.27 r24
  text "T" at 48.262,58.942 h0.64
  text "R" at 50.852,58.942 h0.64
  text "G" at 53.494,58.942 h0.64
  text "白" at 6.072,43.803 h1.27
  text "红" at 9.476,43.79 h1.27
  text "黑" at 12.727,43.752 h1.27
  text "-" at 50.725,43.51 h2.54
  text "+" at 50.7,36.652 h2.54
  text "WX0.011.322PCB-4.2" at 13.845,35.134 h1.02
  text "电池" at 51.487,34.493 h1.27 r90
  text "102010602-0013" at 13.845,33.299 h1.02
  text "WLWn-WP14" at 13.845,31.463 h1.02
  text "2025.9.26" at 13.845,29.628 h1.02
  text "V1" at 13.845,27.793 h1.02
  text "+" at 57.66,26.34 h2.54
  text "C" at 3.1,23.229 h1.02
  text "O" at 5.634,23.229 h1.02
  text "G" at 8.219,23.229 h1.02
  text "R" at 10.803,23.229 h1.02
  text "B" at 13.387,23.229 h1.02
  text "-" at 58.777,19.736 h2.54
  text "V" at 3.405,19.558 h0.64
  text "G" at 54.916,19.279 h1.02
  text "电容" at 58.295,17.653 h1.27
  text "G" at 3.278,17.399 h0.64
  text "T" at 54.891,16.866 h1.02
  text "R" at 54.713,14.732 h1.02
  text "I" at 3.329,14.555 h0.64
  text "C" at 3.329,11.862 h0.64
  text "R" at 3.507,9.576 h0.64
Bottom Overlay:
  lines w0.013: 32.1,2.7 36.1,2.7 ; 32.1,0 32.1,3.5 36.1,3.5 36.1,0 32.1,0
  text "-" at 50.725,43.485 h2.54
  text "+" at 50.624,36.627 h2.54
  text "C" at 3.939,22.797 h1.27
  text "O" at 6.498,22.797 h1.27
  text "G" at 9.057,22.797 h1.27
  text "R" at 11.616,22.797 h1.27
  text "B" at 14.175,22.797 h1.27
  text "V" at 3.939,19.177 h0.64
  text "G" at 3.862,17.45 h0.64
  text "I" at 3.761,14.503 h0.64
  text "C" at 3.989,12.141 h0.64
  text "R" at 3.862,9.652 h0.64
Mechanical 1:
  lines w0.013: 39.303,61.773 39.303,64.773 ; 40.103,61.773 40.103,64.773 ; 38.303,61.773 38.303,64.773 40.603,64.773 40.603,61.773 38.303,61.773
Mechanical 5:
  circle w0.006: c30.638,73.6 r0.003
Mechanical 15:
  circle w0.013: c25.707,47.443 r5
  circle w0.013: c24.6,57.443 r2.5
  lines w0.013: 24.599,57.443 24.599,62.385